# Altium PCB STM32WB55_DB_QFN48_IPD.PcbDoc
Units mm, origin at the board's own origin, x right, y up, seen from the top; angles counter-clockwise.
Board outline 30 x 40 mm, 2 copper layers (L1, L2), stack 1.57 mm thick; 32 components, 34 nets, 134 pads, 289 vias.
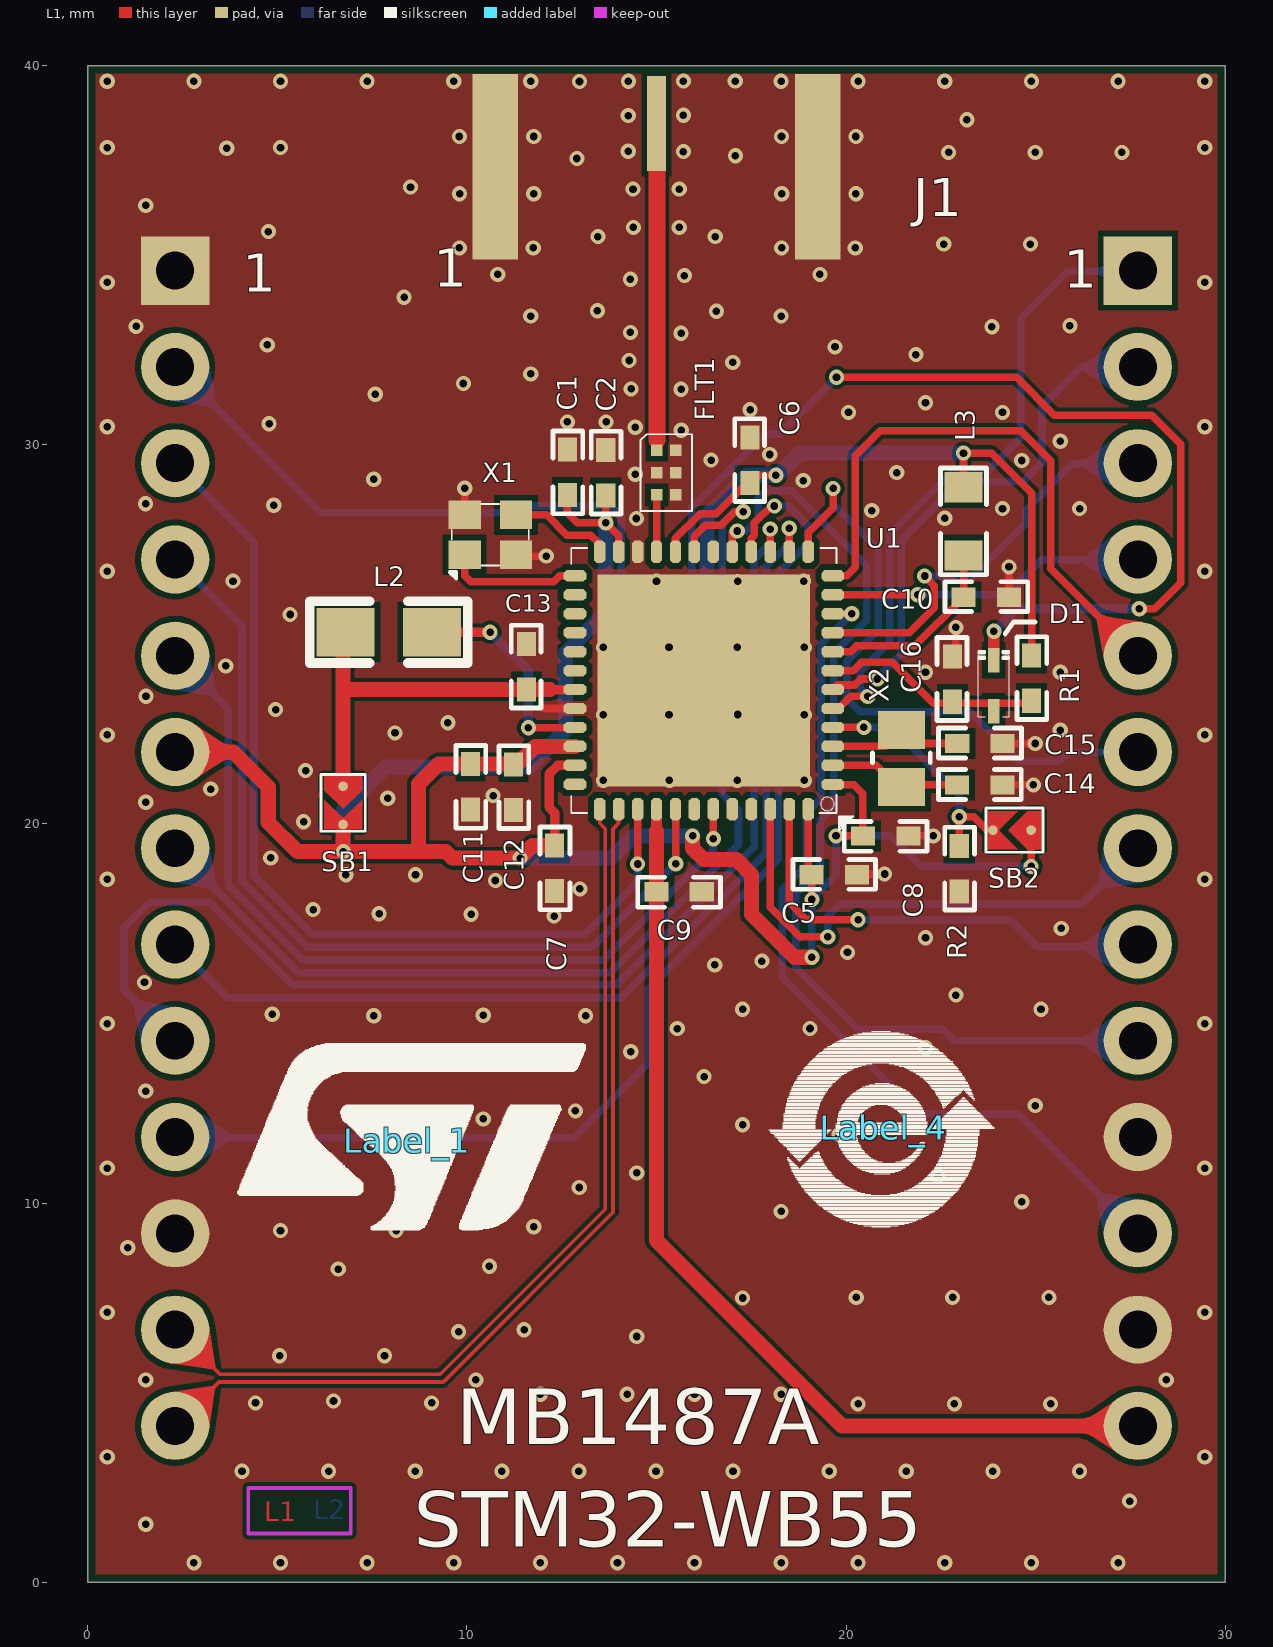
[diagram p0: L1 view]
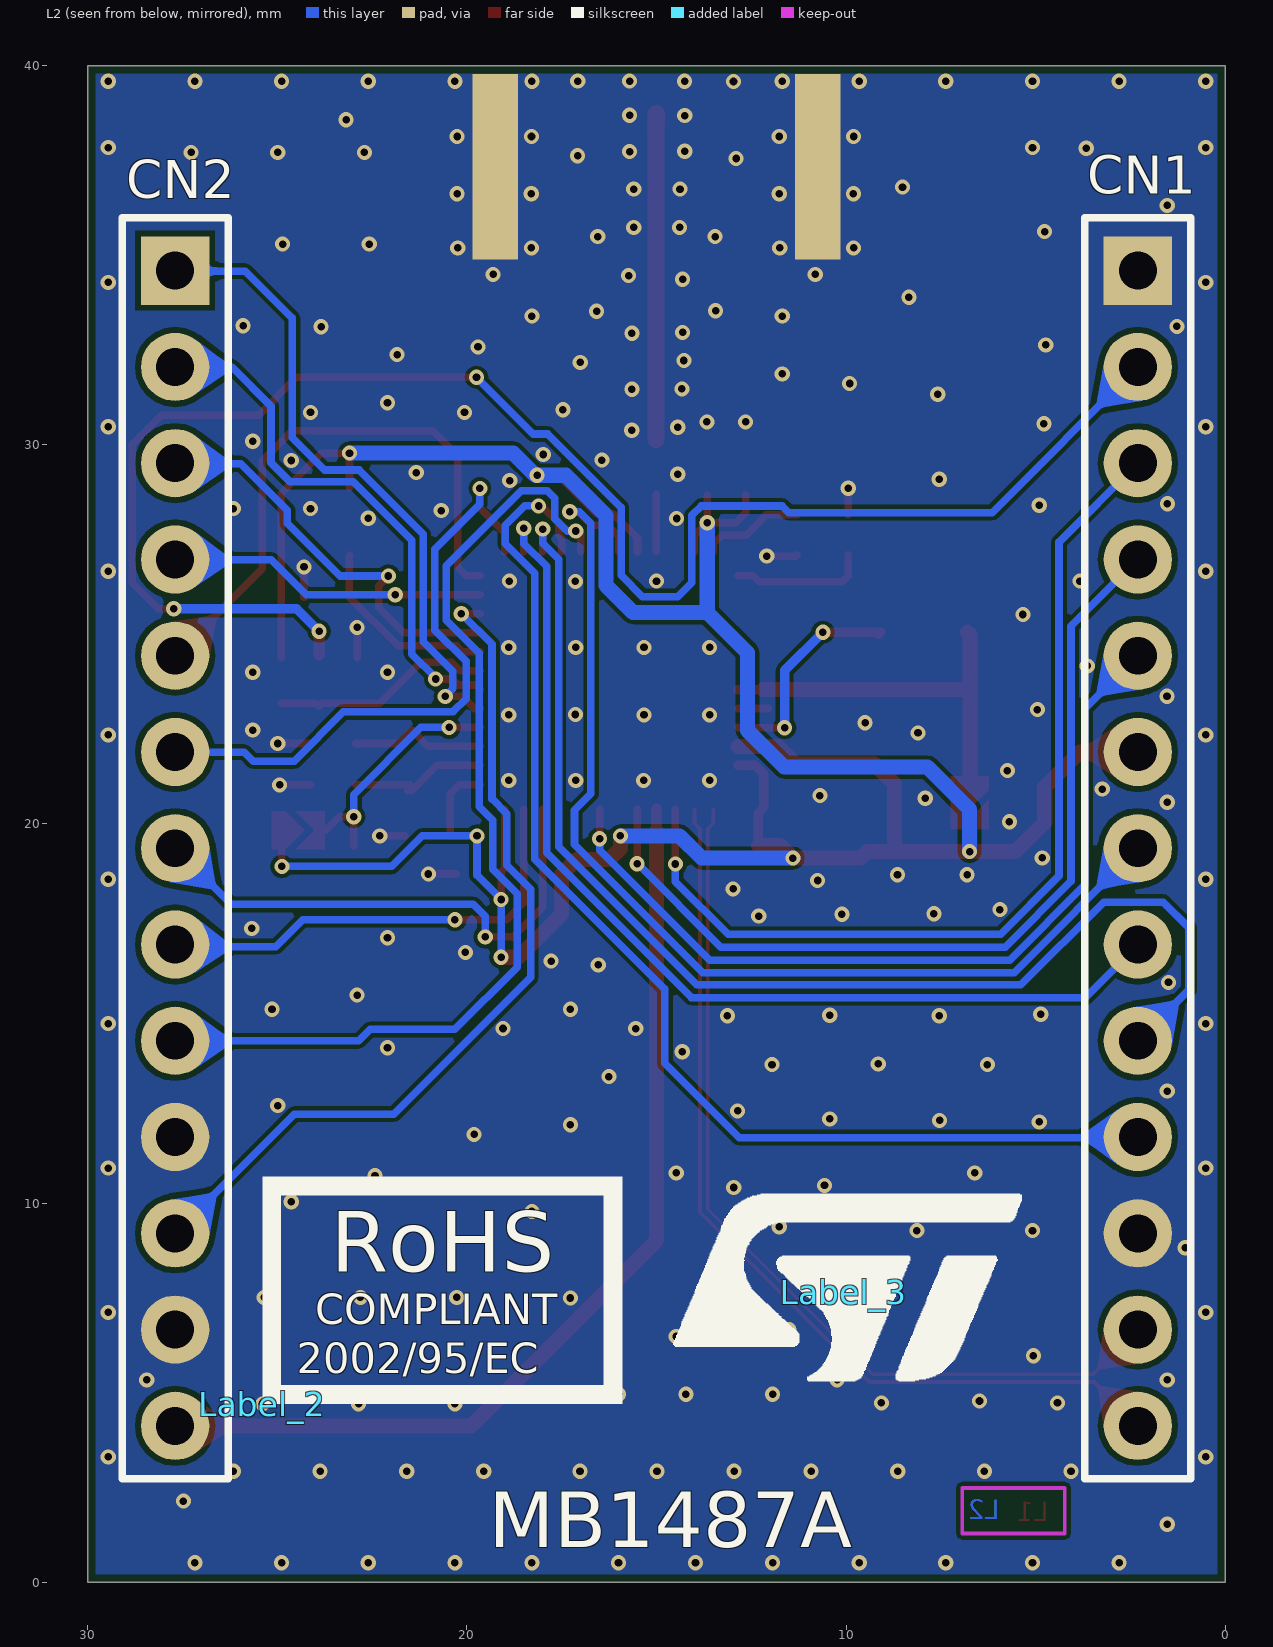
[diagram p1: L2 view, seen from below]

## Layer stack, top to bottom
Top Solder: solder mask 0.0178, Solder Resist, Dk 4
L1: signal copper 0.035
Dielectric1: core 1.5, FR-4, Dk 4.2
L2: signal copper 0.035
Bottom Solder: solder mask 0.0178, Solder Resist, Dk 4

## Board outline
0,0 0,40 30,40 30,0

## Design rules (kind name [scope] priority, off if disabled: settings)
AssemblyTestPointUsage [All] p1 off:
AssemblyTestpoint [All] p1 off: testpointundercomponent=TRUE minsize=1.016 maxsize=2.54 preferedsize=1.524 minholesize=0 maxholesize=1.016 preferedholesize=0.813 testpointgrid=0.025 usegrid=TRUE gridtolerance=0 allowsidetop=TRUE allowsidebottom=TRUE
BoardOutlineClearance [All] p1: gap=0.2 ignorepadtopadclearanceinfootprint=FALSE
Clearance [All] p1: gap=0.1 ignorepadtopadclearanceinfootprint=FALSE except(0.15: SMDPad-Poly THPad-Poly Poly-Region)
ComponentClearance ComponentClearance_SMA [InComponent('J2') vs InComponent('FLT1')] p1: gap=0 collisioncheckmode=3 verticalgap=0 showdistances=FALSE
ComponentClearance [All] p2: gap=0.21 collisioncheckmode=3 verticalgap=0.254 showdistances=FALSE
DiffPairsRouting [All] p1: maxlimit=0.1 minlimit=0.1 mostfreqgap=0.1 toplayer_minwidth=0.1 toplayer_maxwidth=0.1 toplayer_prefwidth=0.1 bottomlayer_minwidth=0.1 bottomlayer_maxwidth=0.1 bottomlayer_prefwidth=0.1 maxuncoupledlength=12.7
FabricationTestPointUsage TestPointUsage [All] p1 off: valid=0 allowmultiple=FALSE
FabricationTestpoint Testpoint [(IsPad And (OnTopLayer Or OnBottomLayer))] p1 off: side=3 testpointundercomponent=TRUE minsize=1.016 maxsize=2.54 preferedsize=1.524 minholesize=0 maxholesize=1.016 preferedholesize=0.813 testpointgrid=0.025 allowsidetop=TRUE allowsidebottom=TRUE usegrid=TRUE gridtolerance=0
FanoutControl Fanout_BGA [IsBGA] p1 off: bgadir=Out bgaviamode=Centered fanoutstyle=Auto fanoutdirection=Alternating viagrid=0.025 // Fanout_BGA (Default Rule)
FanoutControl Fanout_LCC [IsLCC] p2 off: bgadir=Out bgaviamode=Centered fanoutstyle=Auto fanoutdirection=Alternating viagrid=0.025 // Fanout_LCC (Default Rule)
FanoutControl Fanout_SOIC [IsSOIC] p3 off: bgadir=Out bgaviamode=Centered fanoutstyle=Auto fanoutdirection=Alternating viagrid=0.025 // Fanout_SOIC (Default Rule)
FanoutControl Fanout_Small [(CompPinCount < 5)] p4 off: bgadir=Out bgaviamode=Centered fanoutstyle=Auto fanoutdirection=OutThenIn viagrid=0.025 // Fanout_Small (Default Rule)
FanoutControl Fanout_Default [All] p5 off: bgadir=Out bgaviamode=Centered fanoutstyle=Auto fanoutdirection=Alternating viagrid=0.025 // Fanout_Default (Default Rule)
Height [All] p1 off: minheight=0 maxheight=25.4 prefheight=12.7
HoleSize [All] p1 off: absolutevalues=TRUE maxlimit=3.81 minlimit=0.1 maxpercent=80.000 minpercent=20.000
HoleToHoleClearance [All] p1 off: gap=0.254 allowstackedmicrovias=TRUE
LayerPairs [All] p1 off: enforce=FALSE
MinimumSolderMaskSliver [All] p1 off: minsoldermaskwidth=0.254
NetAntennae [All] p1 off: netantennaetolerance=0
PlaneClearance [All] p1 off: clearance=0.508
PlaneConnect [All] p1: planeconnectstyle=Direct reliefexpansion=0.508 reliefentries=4 reliefconductorwidth=0.254 reliefairgap=0.254
PolygonConnect DirectConnect [InPadClass('Direct Connect')] p1: connectstyle=Direct reliefconductorwidth=0.254 reliefentries=4 polygonreliefangle="90 Angle" airgapwidth=0.254
PolygonConnect [All] p2: connectstyle=Direct reliefconductorwidth=0.508 reliefentries=4 polygonreliefangle="90 Angle" airgapwidth=0.254
RoutingCorners [All] p1 off: cornerstyle=45-Degree minsetback=2.54 maxsetback=2.54
RoutingLayers [All] p1 off: top layer_v5=FALSE bottom layer_v5=FALSE
RoutingPriority [All] p1 off: routingpriority=0
RoutingTopology [All] p1 off: topology=Shortest
RoutingVias [All] p1: holewidth=0.3 width=0.4 viastyle="Through Hole" minholewidth=0.1 minwidth=0.2 maxholewidth=3.6 maxwidth=6 useviatemplates=TRUE viatemplateguid#1={8F7D599E-482F-44B4-AF0C-7737083A3772} viatemplatename#1=v40h20m0mx0
SilkToBoardRegionClearance [All] p1 off:
SilkToSilkClearance [All] p1: silktosilkclearance=0.21
SilkToSolderMaskClearance SilkscreenOverComponentPads [IsPad] p1 off: minsilkscreentomaskgap=0.254 clearancetoexposedcopper=TRUE
SolderMaskExpansion [All] p1: expansion=0.05
Width [All] p1: maxlimit=6 minlimit=0.075 preferedwidth=0.2 bottomlayer_minwidth=0.1 minimp=50.000000 maximp=50.000000 favimp=50.000000
4 further rules are at their usual default settings.

## Classes and differential pairs
pad class "Direct Connect": J2-2
differential pair USB: +USB_P -USB_N

## Components (designator, comment, footprint, x,y, rotation, side; value= is the part's Value field where it differs from the comment)
C1 "100nF" 0402_CAP_NPOL 12.65,29.28 r270 top
C2 "100pF" 0402_CAP_NPOL 13.66,29.27 r270 top
C5 "100nF" 0402_CAP_NPOL 19.69,18.66 r0 top
C6 "100nF" 0402_CAP_NPOL 17.47,29.6 r90 top
C7 "100nF" 0402_CAP_NPOL 12.31,18.83 r270 top
C8 "100nF" 0402_CAP_NPOL 21.046,19.685 r180 top
C9 "100nF" 0402_CAP_NPOL 15.596,18.212 r180 top
C10 "100nF" 0402_CAP_NPOL 23.701,25.986 r0 top
C11 "4.7uF" 0402_CAP_NPOL 10.09,20.98 r270 top
C12 "100nF" 0402_CAP_NPOL 11.224,20.97 r270 top
C13 "4.7uF" 0402_CAP_NPOL 11.573,24.151 r90 top
C14 "4.3pF" 0402_CAP_NPOL 23.531,21.031 r0 top
C15 "4.3pF" 0402_CAP_NPOL 23.535,22.123 r0 top
C16 "100nF" 0402_CAP_NPOL 22.809,23.825 r90 top
CN1 "HEADER_1X13" "Header F 1x13x2.54 TH V" 2.3,34.6 r270 bottom locked
CN2 "HEADER_1X13" "Header F 1x13x2.54 TH V" 27.7,34.6 r270 bottom locked
D1 "BAT54K" SOD523 23.901,23.647 r90 top
FLT1 "IPD" IPD 15.258,29.27 r0 top
J1 "SMA_T_9.52_NF" SMA_T_9.52_NF 15,40.894 r90 top locked
L2 "10uH" 0805_COIL_H0.85 9.08,25.06 r180 top
L3 "IND_FCM1608KF-601T03" 0603_COIL 23.101,27.986 r270 top
Label_1 "LOGO_ST" LOGO_ST_Size3 8.43,11.65 r0 top
Label_2 "LOGO_ROHS" SYMBOL_RoHS 25.4,4.699 r180 bottom
Label_3 "LOGO_ST" LOGO_ST_Size3 10.06,7.66 r180 bottom
Label_4 "LOGO_ROHS" SYMBOL_RoHS_China 21,12 r0 top
R1 "100K" 0402_RES 24.892,23.851 r270 top
R2 "10K" 0402_RES 22.987,18.821 r270 top
SB1 "Open" SB-tiny 6.73,20.496 r270 top
SB2 "Open" SB-tiny 24.384,19.837 r180 top
U1 "STM32WBxx_QFN48" STM32WBxx_QFN48 16.249,23.787 r180 top
X1 "NX2016_32M" NX2016_4P 10.614,27.63 r0 top
X2 "NX2012_32K768" NX2012_2P 21.463,20.98 r90 top

## Footprints (in the part's own frame and the unit in brackets; to place one, negate y for a bottom-side part, rotate by r counter-clockwise, add the part's x,y. Pads: shape width x height; smd on the part's side, far side on the other; paste and mask are expansions set on the pad)
0402_CAP_NPOL [mil] "Capacitor FootPrint 0402"
  rect 25x20 smd: 1(-23.58,0) 2(23.58,0)
  silkscreen extent -43,-15 43,16, body extent -39,-14 41,14, height 32
0402_RES [mil] "Resistor FootPrint 0402"
  rect 25x20 smd: 1(-23.58,0) 2(23.58,0)
  silkscreen extent -43,-15 43,16, body extent -38,-11 39,13, height 16
0603_COIL [mm] "Coil Footprint 0603"
  rect 0.8x1 smd: 1(-0.902,0) 2(0.902,0)
  silkscreen extent -1.41,-0.61 1.41,0.61, body extent -1.26,-0.48 1.26,0.48, height 0.4
0805_COIL_H0.85 [mil] "Coil FootPrint 0805"
  rect 60x50 smd: 1(0,0) 2(90,0)
  silkscreen extent -37,-32 127,32, body extent -21,-25 113,25, height 33
"Header F 1x13x2.54 TH V" [mm] "1x13x2.54 Header TH V Female"
  rect 1.8x1.8 hole 1: 1(0,0)
  round 1.8 hole 1: 2(2.54,0) 3(5.08,0) 4(7.62,0) 5(10.16,0) 6(12.7,0) 7(15.24,0) 8(17.78,0) 9(20.32,0) 10(22.86,0) 11(25.4,0) 12(27.94,0) 13(30.48,0)
  silkscreen extent -1.4,-1.4 31.88,1.4, body extent -1.42,-1.33 31.88,1.17, height 8.54
IPD [mm]
  rect 0.3x0.3 smd mask-0.05: 1(0.25,-0.587) 2(0.25,0) 3(0.25,0.587) 4(-0.25,0) 5(-0.25,-0.587) 6(-0.25,0.587)
  silkscreen extent -0.68,-1.02 0.68,1.01
LOGO_ST_Size3 [mm]
  silkscreen extent -4.5,-2.36 4.7,2.57
NX2012_2P [mm]
  rect 1x1.25 smd: 1(0,0) 2(1.5,0)
  silkscreen extent 0.63,-0.76 0.89,0.76, body extent -0.33,-0.76 1.88,0.76, height 0.75
NX2016_4P [mm]
  rect 0.85x0.75 smd: 1(-0.675,-0.525) 2(0.675,-0.525) 3(0.675,0.525) 4(-0.675,0.525)
  silkscreen extent -1.07,-1.16 1.02,0.81, body extent -1,-0.8 1,0.8, height 0.7
SB-tiny [mil]
  round 10 smd paste-10 mask+0.04: 1(-19.68,0)
  round 10 smd paste-10.08 mask+0.04: 2(20,0)
  L1 region: -30,-19.69 -30,19.68 -15.75,19.68 3.94,0 -15.75,-19.69
  L1 region: -5.91,19.68 13.78,0 -5.91,-19.69 25,-19.69 25,19.68
  silkscreen extent -32,-23 27,23
SMA_T_9.52_NF [mm]
  rect 2.5x0.5 smd: 1(-2.413,0)
  rect 4.9x1.2 smd: 2(-3.556,-4.25) 2(-3.556,4.25)
  rect 4.9x1.2 smd far side: 2(-3.556,-4.25) 2(-3.556,4.25)
SOD523 [mm]
  rect 0.65x0.3 smd mask+0.05: A(-0.675,0) K(0.675,0)
  silkscreen extent -0.81,-0.41 0.91,0.41, body extent -0.81,-0.41 0.81,0.41, height 0.62
STM32WBxx_QFN48 [mm] "QFN48 7x7x0.55mm pitch 0.5mm"
  oct 0.6x0.3 smd mask+0.06: 1(-3.398,2.746) 2(-3.398,2.239) 3(-3.398,1.739) 4(-3.398,1.239) 5(-3.398,0.739) 6(-3.398,0.239) 7(-3.398,-0.261) 8(-3.398,-0.761) 9(-3.398,-1.261) 10(-3.398,-1.761) 11(-3.398,-2.261) 12(-3.398,-2.761) 25(3.398,-2.761) 26(3.398,-2.261) 27(3.398,-1.761) 28(3.398,-1.261) 29(3.398,-0.761) 30(3.398,-0.261) 31(3.398,0.239) 32(3.398,0.739) 33(3.398,1.239) 34(3.398,1.739) 35(3.398,2.239) 36(3.398,2.739)
  oct 0.3x0.6 smd mask+0.06: 13(-2.752,-3.399) 14(-2.252,-3.399) 15(-1.752,-3.399) 16(-1.252,-3.399) 17(-0.752,-3.399) 18(-0.252,-3.399) 19(0.248,-3.399) 20(0.748,-3.399) 21(1.248,-3.399) 22(1.748,-3.399) 23(2.248,-3.399) 24(2.748,-3.399) 37(2.748,3.399) 38(2.248,3.399) 39(1.748,3.399) 40(1.248,3.399) 41(0.748,3.399) 42(0.248,3.399) 43(-0.252,3.399) 44(-0.752,3.399) 45(-1.252,3.399) 46(-1.752,3.399) 47(-2.252,3.399) 48(-2.752,3.399)
  rect 5.6x5.6 smd paste-3 mask+0.08: 49(0,0)
  silkscreen extent -3.95,-3.5 3.5,3.96, body extent -3.51,-3.51 3.51,3.51, height 0.78
SYMBOL_RoHS [mm]
  silkscreen extent 0,0 9.5,6
SYMBOL_RoHS_China [mm]
  silkscreen extent -3.03,-2.62 2.91,2.53

## Part data
C1 C2 C5 C6 C7 C8 C9 C10 C11 C12 C13 C14 C15 C16: library part CAP_NPOL, "Capacitor_not polarized"
D1: "Schottky Diode"
L2: library part IND_LQM21FN100M70L, "Coil Murata 10uH ref: LQM21FN100M70L", Manufacturer=Murata, Part Number=LQM21FN100M70L
R1 R2: library part RES, "Resistor"
SB1 SB2: library part Strap2, "Solder Jumper", Published=24-Mar-1999, Publisher="Altium Limited", Revision="July-2002: Re-released for DXP Platform.", Solder=YES
X1: "Crystal NDK 2.0x1.6mm  32 MHz", Manufacturer=NDK, Manufacturer P/N="NX2016SA 32 MHz EXS00A-CS06654"
X2: "Crystal NDK 2.0x1.2mm  32.768 KHz", Manufacturer=NDK, Manufacturer P/N="NX2012SA 32.768KHz  EXS00A-MU00389"
Label_1 Label_2 Label_3 Label_4: Silkscreen Only=YES

## Via types
v1: diameter 0.4, hole 0.2, L1 to L2, tented both sides, 289 vias

## Nets (pads, with @x,y where several pads share a name; then routed paths per layer and width w, separated by ;. In a path a pad name is that pad's centre, name@x,y a point inside that pad or via, vN(x,y) a via of type N, cw(c..) or ccw(c..) an arc to the next point about the centre after c; other vN are vias at no path point)
3V3: C1.2 C2.2 C5.1 C6.1 C7.1 C8.2 C11.1 C12.1 CN1.6 L3.1 R1.1 SB1.2 SB2.1 U1.1 U1.20 U1.23 U1.34 U1.35 U1.48 | length 87.1
  L1 w0.2: CN1.6@2.301,21.576 CN1.6@2.314,21.563 ; C7.1 C7.1@12.31,19.431 ; C1.2 12.65,28.212 12.912,27.95 v1(13.66,27.95) ; C2.2 v1(13.66,27.95) ; U1.23 14.001,27.609 v1(13.66,27.95) ; U1.20 15.501,27.541 16.15,28.19 16.58,28.19 17.59,29.2 v1(18.15,29.2) ; U1.48 19.001,18.841 19.101,18.741 v1(19.101,18.009) ; U1.1 20.209,21.041 20.447,20.803 C8.2 v1(19.736,19.685) ; L3.1 L3.1 v1(23.1,29.787) 23.843,29.787 24.901,28.729 R1.1@24.901,24.385 ; v1(24.884,18.88) SB2.1
  L1 w0.25: C7.1@12.31,19.431 12.31,20.297 12.167,20.44 12.167,21.319 12.395,21.548 U1.35
  L1 w0.4: CN1.6 3.833,21.9 4.756,20.977 4.756,20.038 5.523,19.27 v1(6.74,19.27) ; SB1.2 6.73,19.28 v1(6.74,19.27) ; C7.1 11.73,19.429 v1(11.401,19.1) 9.61,19.1 9.44,19.27 8.722,19.27 ; U1.34 11.795,22.048 11.316,21.569 C12.1 11.214,21.579 C11.1 9.249,21.579 8.722,21.052 8.722,19.27 ; v1(15.951,19.685) 15.951,19.355 16.246,19.06 17.11,19.06 17.51,18.66 17.51,17.62 18.645,16.485 v1(19.101,16.485) ; v1(6.74,19.27) 8.722,19.27
  L2 w0.2: v1(19.101,16.485) v1(19.101,18.009) 19.736,18.644 v1(19.736,19.685) 21.184,19.685 21.988,18.88 v1(24.884,18.88)
  L2 w0.4: v1(6.74,19.27) 6.74,20.39 7.85,21.5 11.63,21.5 12.6,22.47 12.6,24.52 13.66,25.58 15.62,25.58 16.33,26.29 16.33,28.14 17.39,29.2 v1(18.15,29.2) 18.195,29.2 18.782,29.787 v1(23.1,29.787) ; v1(11.401,19.1) 13.805,19.1 14.39,19.685 v1(15.951,19.685) ; 13.66,25.679 v1(13.66,27.95)
GND: C1.1 C2.1 C5.2 C6.2 C7.2 C8.1 C9.1 C10.2 C11.2 C12.2 C13.2 C14.2 C15.2 C16.2 CN1.1 CN1.11 CN2.10 CN2.12 FLT1.1 FLT1.2 FLT1.3 FLT1.4 J1.2 R2.2 U1.22 U1.32 U1.49 X1.2 X1.4 | length 7
  L1 w0.2: X1.4 v1@9.939,28.859 ; X1.2 11.324,27.07 v1(12.09,27.07) ; 12.055,23.048 U1.32 ; C5.2@20.289,18.68 v1(21.02,18.68) ; C8.1 v1(22.301,19.685) ; C16.2@22.901,24.385 v1(22.901,25.186) ; C14.2 v1(24.943,21.031) ; C15.2 v1(24.994,22.123) ; C10.2 v1(24.3,26.785)
  other v1: 2.794,0.508 5.08,0.508 7.366,0.508 9.652,0.508 11.938,0.508 13.97,0.508 16.002,0.508 18.288,0.508 20.32,0.508 22.606,0.508 24.892,0.508 27.178,0.508 1.524,1.524 27.483,2.134 4.064,2.921 6.35,2.921 8.636,2.921 10.922,2.921 12.954,2.921 14.986,2.921 17.018,2.921 19.558,2.921 21.59,2.921 23.876,2.921 26.162,2.921 0.508,3.302 29.464,3.302 20.32,4.699 22.86,4.699 25.4,4.699 4.42,4.724 9.068,4.724 6.477,4.775 11.938,4.953 14.224,4.953 16.002,4.953 18.288,4.953 1.524,5.334 10.236,5.334 28.448,5.334 5.055,5.969 7.823,5.969 14.478,6.477 9.779,6.604 11.506,6.655 0.508,7.112 29.464,7.112 17.272,7.493 20.272,7.51 22.812,7.51 25.352,7.51 6.604,8.255 10.592,8.331 1.05,8.82 5.08,9.271 8.128,9.271 11.76,9.373 18.288,9.779 24.638,10.033 12.96,10.41 10.566,10.465 22.428,10.719 6.604,10.795 14.478,10.795 0.508,10.922 29.464,10.922 19.812,11.811 17.272,12.065 4.9,12.14 7.53,12.18 10.43,12.22 12.86,12.43 24.994,12.57 1.524,12.954 16.256,13.335 6.27,13.65 11.952,13.65 9.15,13.67 14.32,13.99 22.098,14.097 15.548,14.6 19.05,14.605 0.508,14.732 29.464,14.732 7.54,14.94 10.43,14.956 13.13,14.94 4.86,14.98 17.272,15.113 25.146,15.113 22.9,15.487 1.49,15.82 16.535,16.281 17.78,16.383 20.041,16.612 22.098,17 25.679,17.247 12.3,17.569 10.11,17.62 7.68,17.63 5.94,17.74 12.979,18.288 10.75,18.51 0.508,18.542 29.464,18.542 6.804,18.66 8.642,18.66 4.823,19.105 5.69,20.06 1.524,20.574 7.908,20.68 10.69,20.75 3.24,20.921 13.6,21.15 15.34,21.15 17.13,21.15 18.9,21.15 5.74,21.41 0.508,22.352 29.464,22.352 8.1,22.403 25.654,22.479 9.497,22.67 13.6,22.88 15.33,22.88 18.9,22.88 17.14,22.89 4.95,23.02 1.53,23.37 22.098,24.003 25.654,24.003 3.634,24.17 13.6,24.66 15.33,24.66 17.13,24.66 18.9,24.66 5.334,25.527 3.826,26.41 15,26.41 17.14,26.4 18.88,26.41 0.508,26.67 29.464,26.67 14.47,28.06 22.606,28.067 20.678,28.269 24.13,28.321 26.162,28.321 4.9,28.41 1.52,28.45 9.94,28.86 18.87,29.06 7.54,29.098 14.44,29.23 21.34,29.27 16.44,29.6 24.638,29.591 17.99,29.75 25.654,30.099 15.654,30.391 14.44,30.47 0.508,30.48 29.464,30.48 4.78,30.56 12.65,30.61 13.67,30.61 20.066,30.861 24.13,30.861 17.47,30.929 22.098,31.115 7.58,31.34 14.33,31.48 15.648,31.47 9.906,31.623 11.684,31.877 17.01,32.18 14.277,32.23 21.844,32.385 19.71,32.588 4.73,32.64 15.65,32.95 14.31,32.97 1.27,33.13 23.85,33.12 25.908,33.147 11.684,33.401 18.288,33.401 13.44,33.54 16.58,33.53 8.34,33.9 0.508,34.29 29.464,34.29 14.31,34.375 15.737,34.47 10.81,34.5 19.31,34.5 9.8,35.2 11.746,35.2 18.3,35.2 20.246,35.2 22.58,35.3 24.866,35.3 13.452,35.5 16.55,35.5 4.76,35.63 14.39,35.74 15.6,35.74 1.524,36.322 9.805,36.63 11.76,36.63 18.305,36.63 20.26,36.63 14.38,36.75 15.6,36.75 8.509,36.805 12.9,37.56 17.08,37.63 22.708,37.72 24.994,37.72 27.28,37.72 14.253,37.75 15.71,37.74 3.66,37.83 0.508,37.846 5.08,37.846 29.464,37.846 9.798,38.14 11.76,38.14 18.298,38.14 20.26,38.14 23.19,38.581 14.253,38.69 15.71,38.7 12.968,39.59 0.508,39.596 2.794,39.596 5.08,39.596 7.366,39.596 9.652,39.596 11.684,39.596 14.26,39.596 15.71,39.6 17.078,39.6 18.288,39.596 20.32,39.596 22.606,39.596 24.892,39.596 27.178,39.596 29.464,39.596
NetC10_1: C10.1 L3.2 U1.8 | length 5.1
  L1 w0.2: U1.8 20.126,24.548 20.278,24.7 21.816,24.7 C10.1 23.102,27.083 L3.2
NetC13_1: C13.1 L2.2 SB1.1 U1.31 | length 10.2
  L1 w0.25: 12.194,23.548 U1.31
  L1 w0.4: SB1.1 6.73,23.548 ; L2.2 6.73,24.996 6.73,23.548 ; 12.194,23.548 6.73,23.548
NetC14_1: C14.1 U1.2 X2.1 | length 3.7
  L1 w0.2: U1.2 20.798,21.548 X2.1@21.463,20.883 ; X2.1@21.565,20.879 X2.1 21.514,21.031 C14.1
NetC15_1: C15.1 U1.3 X2.2 | length 3.6
  L1 w0.2: U1.3 21.03,22.048 X2.2 21.82,22.123 C15.1
NetC16_1: C16.1 D1.A R1.2 U1.7 | length 5.9
  L1 w0.2: U1.7 20.187,24.048 20.409,24.27 21.221,24.27 22.304,23.187 23.825,23.187 23.901,23.111 23.977,23.187 R1.2@24.901,23.187
NetCN1_2: CN1.2 D1.K | length 44.1
  L1 w0.2: v1(19.75,31.787) 24.5,31.787 25.5,30.787 28.066,30.787 28.83,30.023 28.83,26.36 28.149,25.679 v1(27.737,25.679)
  L1 w0.3: D1.K@23.901,24.461 v1(23.901,25.086)
  L2 w0.2: CN1.2 6.144,28.216 11.508,28.216 11.682,28.39 13.82,28.39 14.07,28.14 14.07,26.37 14.44,26 15.37,26 15.93,26.56 15.93,28.35 17.87,30.29 18.253,30.29 v1(19.75,31.787)
  L2 w0.25: v1(23.901,25.086) 24.494,25.679 v1(27.737,25.679)
NetCN1_3: CN1.3 U1.39 | length 25
  L1 w0.2: v1(14.501,18.946) U1.39
  L2 w0.2: CN1.3 4.38,27.44 4.38,18.63 5.92,17.09 13.11,17.09 14.501,18.481 v1(14.501,18.946)
NetCN1_4: CN1.4 U1.41 | length 23.7
  L1 w0.2: U1.41 15.51,20.379 v1(15.51,18.95)
  L2 w0.2: CN1.4 4.064,25.216 4.064,18.486 5.797,16.753 13.298,16.753 15.496,18.95 v1(15.51,18.95)
NetCN1_5: CN1.5 U1.43 | length 22.5
  L1 w0.2: v1(16.501,19.609) U1.43
  L2 w0.2: CN1.5 3.697,23.043 3.697,18.393 5.68,16.41 13.6,16.41 16.501,19.311 v1(16.501,19.609)
NetCN1_7: CN1.7 U1.19 | length 28.9
  L1 w0.2: U1.19 16.001,27.591 16.29,27.88 16.71,27.88 17.07,28.24 v1(17.29,28.24)
  L2 w0.2: CN1.7@2.3,19.347 5.567,16.08 13.78,16.08 17.164,19.464 17.164,20.367 16.73,20.802 16.73,27.929 17.041,28.24 v1(17.29,28.24)
NetCN1_8: CN1.8 U1.14 | length 27.2
  L1 w0.2: U1.14 v1(18.501,27.804)
  L2 w0.2: CN1.8@2.3,16.807 3.687,15.42 14.076,15.42 17.9,19.244 17.9,26.8 18.501,27.401 v1(18.501,27.804)
NetCN1_9: CN1.9 U1.15 | length 32
  L1 w0.2: U1.15 v1(18,27.78)
  L2 w0.2: CN1.9 0.95,15.63 0.95,17.26 1.63,17.94 3.204,17.94 5.388,15.756 13.936,15.756 17.58,19.4 17.58,26.99 18.001,27.411 v1(18,27.78)
NetCN1_10: CN1.10 U1.16 | length 32
  L1 w0.2: U1.16 17.501,27.541 17.58,27.62 17.58,27.948 18.022,28.39 v1(18.11,28.39)
  L2 w0.2: CN1.10@2.3,11.727 12.819,11.727 14.78,13.688 14.78,15.646 18.21,19.076 18.21,26.62 18.989,27.399 18.989,27.886 18.478,28.396 18.02,28.396 18.026,28.39 v1(18.11,28.39)
NetCN2_1: CN2.1 U1.5 | length 17
  L1 w0.2: U1.5 19.805,23.048 20.125,23.368 v1(20.574,23.368)
  L2 w0.2: v1(20.574,23.368) 20.371,23.571 20.371,24.028 21.15,24.808 21.15,27.65 22.84,29.34 23.753,29.34 24.61,30.197 24.61,33.35 25.847,34.587 CN2.1@27.7,34.587
NetCN2_2: CN2.2 U1.6 | length 14.2
  L1 w0.2: U1.6 19.768,23.668 20.231,23.668 20.389,23.825 v1(20.828,23.825)
  L2 w0.2: v1(20.828,23.825) 20.828,23.853 21.46,24.485 21.46,27.49 23,29.03 24.67,29.03 25.171,29.531 25.171,31.021 26.197,32.047 CN2.2@27.7,32.047
NetCN2_3: CN2.3 U1.9 | length 10.9
  L1 w0.2: U1.9 21.67,25.048 22.327,25.705 22.327,26.289 v1(22.073,26.543)
  L2 w0.2: v1(22.073,26.543) 23.343,26.543 24.74,27.94 24.74,28.28 25.967,29.507 CN2.3@27.7,29.507
NetCN2_4: CN2.4 U1.11 | length 8.4
  L1 w0.2: U1.11 v1(21.895,26.048)
  L2 w0.2: v1(21.895,26.048) 24.244,26.048 25.164,26.967 CN2.4@27.7,26.967
NetCN2_5: CN2.5 U1.12 | length 15.5
  L1 w0.2: U1.12 20.02,26.548 20.243,26.77 20.243,29.717 20.904,30.378 24.609,30.378 25.401,29.586 25.4,29.585 25.4,26.74 CN2.5
NetCN2_6: CN2.6 U1.13 | length 16.1
  L1 w0.2: U1.13 19.001,27.687 19.66,28.346 v1(19.66,28.854)
  L2 w0.2: v1(19.66,28.854) 19.66,28.44 20.85,27.25 20.85,25.117 20.023,24.29 20.023,23.307 20.37,22.96 23.26,22.96 24.559,21.661 25.641,21.661 25.875,21.895 26.995,21.895 CN2.6@27,21.9
NetCN2_7: CN2.7 U1.46 | length 13.9
  L1 w0.2: U1.46 18.001,17.809 18.792,17.018 18.794,17.02 v1(19.52,17.02)
  L2 w0.2: v1(19.52,17.02) 19.52,17.564 19.838,17.882 26.222,17.882 CN2.7
NetCN2_8: CN2.8 U1.47 | length 11.5
  L1 w0.2: U1.47 18.501,17.929 18.955,17.475 v1(20.32,17.475)
  L2 w0.2: v1(20.32,17.475) 24.333,17.475 25.044,16.764 26.957,16.764 CN2.8@27,16.807
NetCN2_9: CN2.9 U1.17 | length 26.9
  L1 w0.2: U1.17 v1@17,27.696 ; v1@17.006,27.691 v1@17,27.696 ; v1(17.13,27.73) 17.074,27.73 17.054,27.71 17.034,27.73 v1@17,27.696
  L2 w0.2: v1(17.13,27.73) 17.36,27.73 17.69,28.06 17.69,28.6 17.88,28.79 18.57,28.79 20.55,26.81 20.55,25.376 19.68,24.506 19.68,20.46 19.32,20.1 19.32,18.81 18.675,18.165 18.675,16.224 20.32,14.58 22.555,14.58 22.855,14.28 CN2.9
NetCN2_11: CN2.11 U1.10 | length 23
  L1 w0.2: U1.10 v1(20.15,25.548)
  L2 w0.2: v1(20.15,25.548) 19.34,24.738 19.34,20.66 18.95,20.27 18.95,18.91 18.32,18.28 18.32,15.958 21.933,12.344 24.556,12.344 CN2.11
NetFLT1_5: FLT1.5 U1.21 | length 1.9
  L1 w0.2: U1.21 U1.21@15.002,27.187 ; 15.002,27.58 U1.21@15.002,27.187 ; FLT1.5@15.002,28.693 U1.21@15.002,27.187
NetFLT1_6: FLT1.6 J1.1 | length 9
  L1 w0.45: J1.1 J1.1@15,38.747 ; 15.011,30.13 J1.1@15.011,38.47 ; J1.1@15.015,38.747 15.018,38.481 J1.1@15.02,38.33
NetL2_1: L2.1 U1.33 | length 5.8
  L1 w0.2: v1(11.62,22.54) 12.843,22.54 U1.33
  L1 w0.25: L2.1@9.14,25 L2.1 v1(10.61,25.06)
  L2 w0.25: v1(10.61,25.06) 11.62,24.05 v1(11.62,22.54)
NetR2_1: R2.1 SB2.2 U1.4 | length 6.5
  L1 w0.2: U1.4 v1(20.472,22.548) ; R2.1 v1(22.987,20.193) 23.368,20.193 23.724,19.837 SB2.2
  L2 w0.2: v1(20.472,22.548) 21.216,22.548 22.987,20.777 v1(22.987,20.193)
NetU1_24: U1.24 X1.3 | length 2.7
  L1 w0.2: X1.3 12.103,28.155 12.638,27.62 13.27,27.62 13.501,27.389 U1.24
NetU1_25: U1.25 X1.1 | length 3.6
  L1 w0.2: X1.1 9.939,26.555 10.105,26.39 12.29,26.39 12.448,26.548 U1.25
USB_N: CN1.12 U1.37 | length 24.3
  L1 w0.1: CN1.12 3.48,5.48 9.293,5.48 13.65,9.837 13.65,19.869 13.501,20.018 U1.37
USB_P: CN1.13 U1.38 | length 24.6
  L1 w0.1: CN1.13 3.46,5.28 9.376,5.28 13.85,9.754 13.85,19.868 14.001,20.018 U1.38
VDDUSB: C9.2 CN2.13 U1.40 | length 26.1
  L1 w0.3: 15.001,19.81 U1.40
  L1 w0.4: C9.2 14.997,9.013 19.89,4.12 CN2.13 ; C9.2@15.001,18.212 15.001,19.81
pads on no net: U1.18 U1.26 U1.27 U1.28 U1.29 U1.30 U1.36 U1.42 U1.44 U1.45

## Polygon pours and split planes (outlines as drawn)
GND on L2 "GND_L02_P029" (solid, remove dead copper, pour order 29): 0,40 30,40 30,0 0,0
GND on L1 "GND_L01_P028" (solid, remove dead copper, pour order 28): 0,40 30,40 30,0 0,0

## Keep-outs
Keep-Out Layer:
  lines w0.1: 4.23,1.283 4.23,2.483 6.93,2.483 6.93,1.283 4.23,1.283

## Other copper
L1:
  text "L1" at 4.648,1.6 h0.51
  text "LAYER TOP" at 12,-25 h1.52
L2:
  text "L2" at 5.944,1.651 h0.51
  text "LAYER BOTTOM" at 12,-25 h1.52

## Silkscreen, mask and mechanical layers (free items; w line width, h text height)
Top Overlay:
  lines w0.127: 24.2,25.01 24.42,25.33 24.99,25.33
  text "1" at 9.12,34.17 h1
  text "1" at 25.752,34.147 h1
  text "1" at 4.082,34.047 h1
  text "MB1487A" at 9.717,3.15 h2.5
  text "STM32-WB55" at 8.59,0.44 h2.5
  text "SILKSCREEN TOP" at 12,-25 h1.52
Bottom Overlay:
  text "MB1487A" at 19.426,0.43 h2.5
  text "SILKSCREEN BOTTOM" at 12,-25 h1.52
Top Paste:
  text "TOP PASTE" at 12,-25 h1.52
Top Solder:
  the board outline again, w0.3
  text "TOP SOLDER" at 12,-25 h1.52
Bottom Solder:
  the board outline again, w0.3
  text "BOTTOM SOLDER" at 12,-25 h1.52
Mechanical 1:
  the board outline again, w0.1
Fiche Gerber:
  text "BOARD : STM32WB55_DB_QFN48_P" at 0,-19 h1.52
  text "REV   : A" at 0,-22 h1.52
  text "FILM  :" at 0,-25 h1.52
  text "DRAWN : CENTUM-ADENEO" at 0,-28 h1.52
  text "DATE  : 2017/45" at 0,-31 h1.52
Drill Drawing:
  lines w0.1: -63.083,-28.527 -62.749,-28.527 -62.749,-28.86 -62.083,-28.86 -62.083,-28.527 -61.749,-28.527 -61.749,-27.86 -62.083,-27.86 -62.083,-27.527 -62.749,-27.527 -62.749,-27.86 -63.083,-27.86 -63.083,-28.527 ; -63.083,-25.86 -62.416,-25.527 -61.749,-25.86 -62.083,-25.193 -61.749,-24.527 -62.416,-24.86 -63.083,-24.527 -62.749,-25.193 -63.083,-25.86
  lines w0.2: -64.247,-29.76 84.871,-29.76 ; -64.247,-23.76 84.871,-23.76 ; -53.55,-32.76 -53.55,-20.76 ; -41.953,-32.76 -41.953,-20.76 ; -27.837,-32.76 -27.837,-20.76 ; -18.039,-32.76 -18.039,-20.76 ; -3.683,-32.76 -3.683,-20.76 ; 19.79,-32.76 19.79,-20.76 ; 31.267,-32.76 31.267,-20.76 ; 57.619,-32.76 57.619,-20.76 ; -64.247,-32.76 84.871,-32.76 84.871,-20.76 -64.247,-20.76 -64.247,-32.76
  text "Symbol" at -62.447,-22.86 h1.44
  text "Count" at -52.65,-22.86 h1.44
  text "Hole Size" at -41.053,-22.86 h1.44
  text "Plated" at -26.937,-22.86 h1.44
  text "Hole Type" at -17.139,-22.86 h1.44
  text "Drill Layer Pair" at -2.783,-22.86 h1.44
  text "Via/Pad" at 20.69,-22.86 h1.44
  text "Hole Tolerance (+)" at 32.167,-22.86 h1.44
  text "Hole Tolerance (-)" at 58.519,-22.86 h1.44
  text "289" at -52.65,-25.86 h1.2
  text "0.20mm" at -41.053,-25.86 h1.2
  text "PTH" at -26.937,-25.86 h1.2
  text "Round" at -17.139,-25.86 h1.2
  text "L1 - L2" at -2.783,-25.86 h1.2
  text "Via" at 20.69,-25.86 h1.2
  text "26" at -52.65,-28.86 h1.2
  text "1.00mm" at -41.053,-28.86 h1.2
  text "PTH" at -26.937,-28.86 h1.2
  text "Round" at -17.139,-28.86 h1.2
  text "L1 - L2" at -2.783,-28.86 h1.2
  text "Pad" at 20.69,-28.86 h1.2
  text "315 Total" at -52.65,-31.86 h1.2

## Dimensions
0,0 to 2.3,4.12 on Drill Drawing
0,0 to 2.3,4.12 on Drill Drawing
0,0 to 30,-0.1 on Drill Drawing
0,0 to 0,40 on Drill Drawing

## Text inside footprints (layer, text, board x,y; h text height)
Label_2: Bottom Overlay "RoHS" at 23.596,8.182 h1.6; Bottom Overlay "COMPLIANT" at 24,6.799 h0.8; Bottom Overlay "2002/95/EC" at 24.496,5.512 h0.8